# EAGLE board ADTWin-Octopus (EAGLE 6.6.0)
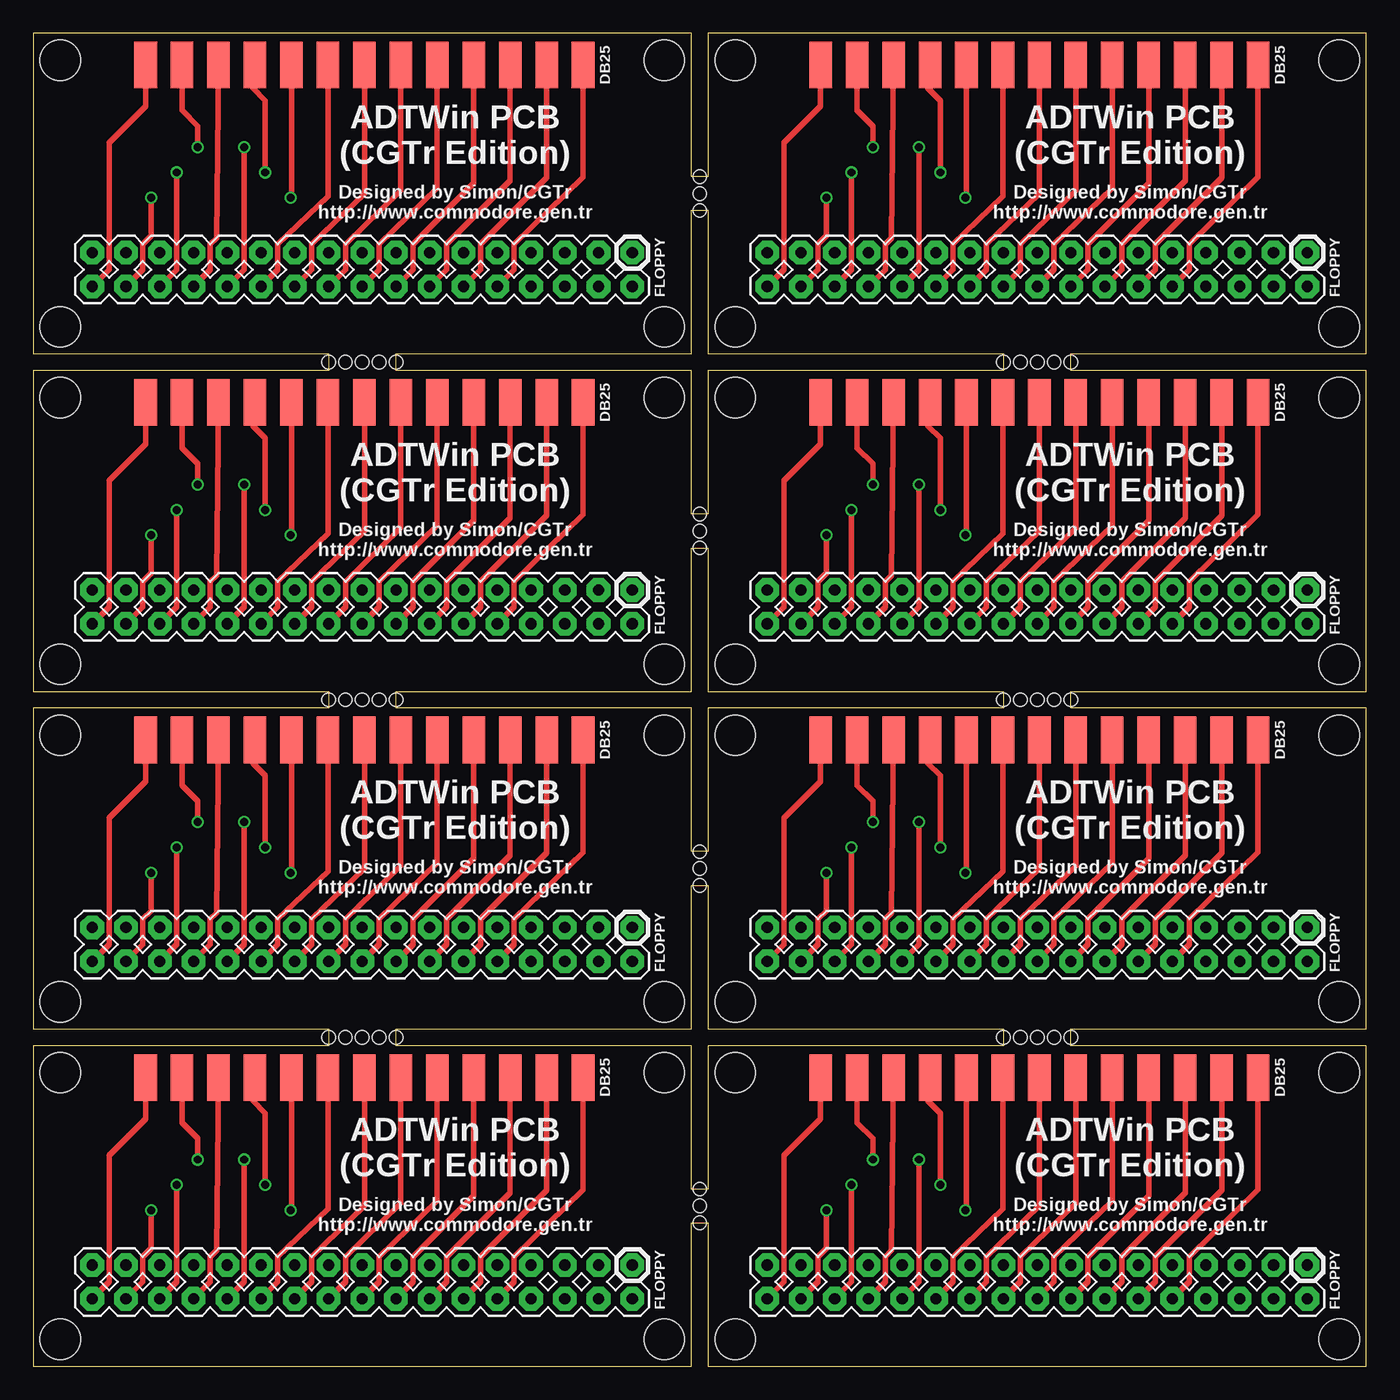
[diagram p0: board, top side]
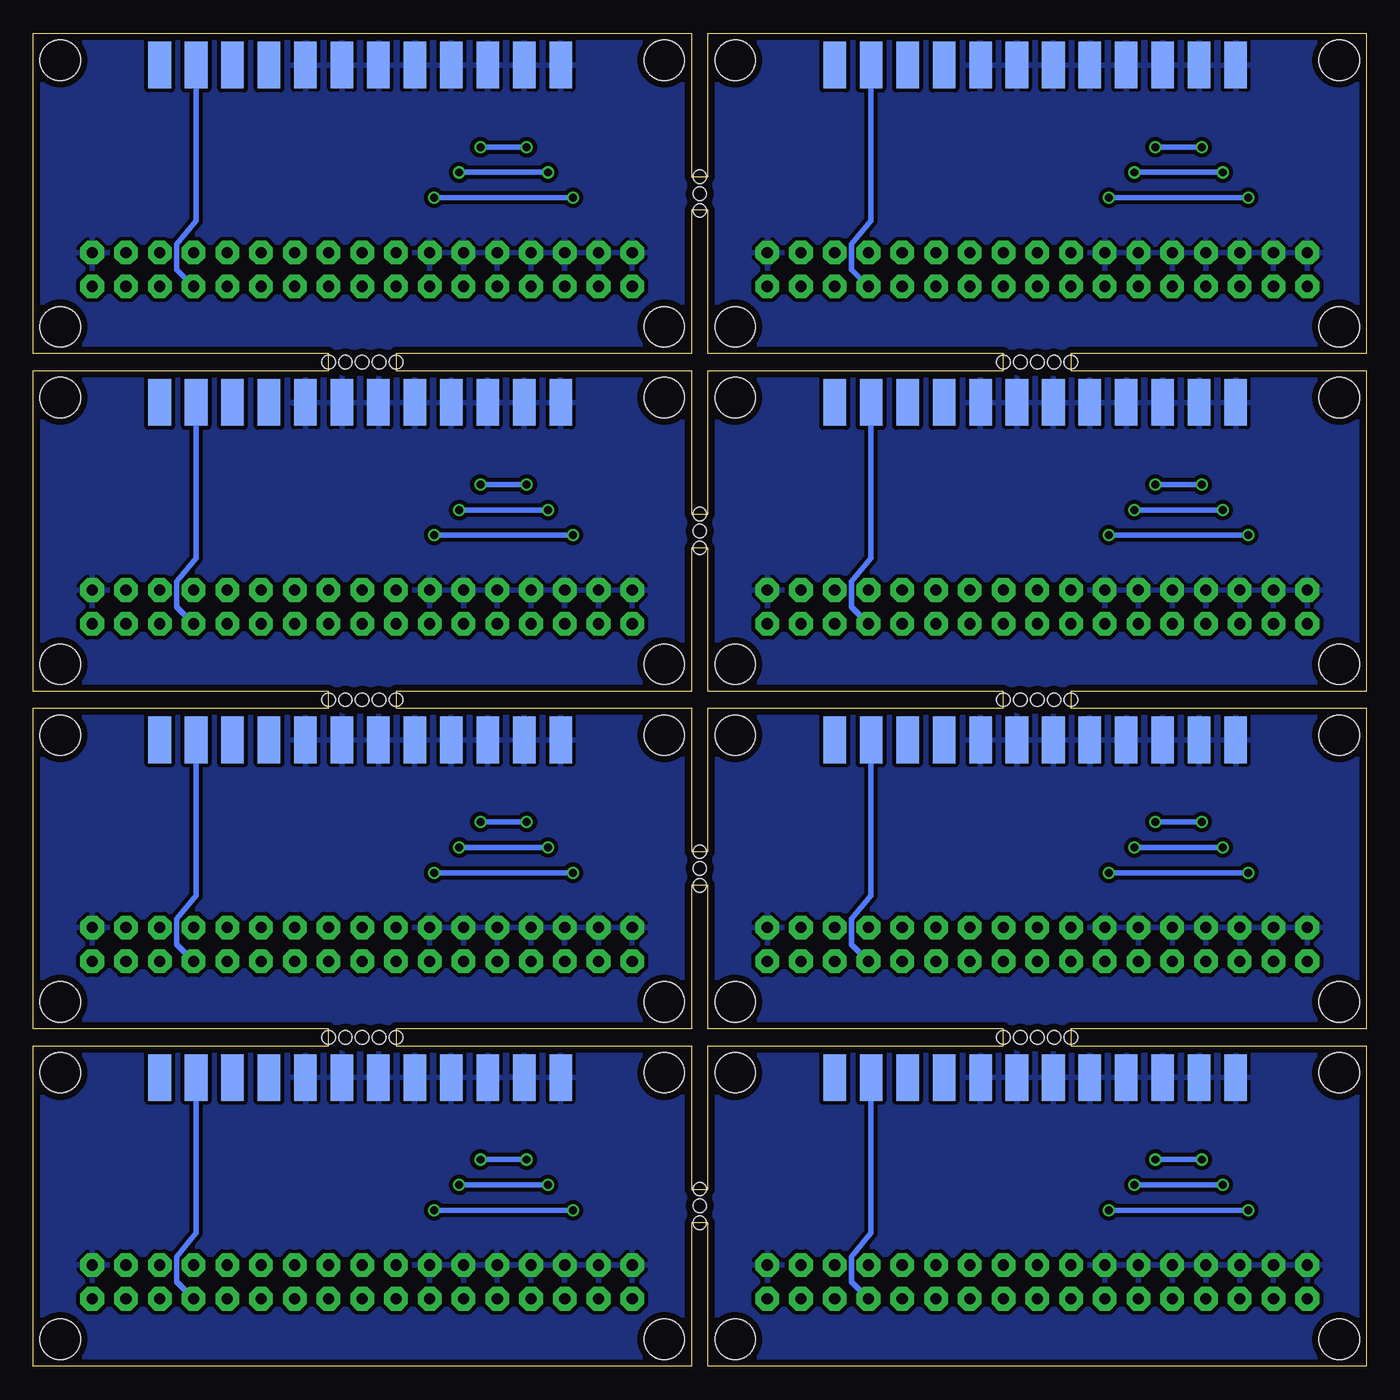
[diagram p1: board, bottom side, seen from below]

Size 100.33 x 100.33 mm. Coordinates in mm from the lower left corner, seen from the top.
Outline: 0,0 49.53,0 49.53,10.79 50.8,10.79 50.8,0 100.33,0 100.33,24.13 78.11,24.13 78.11,25.4 100.33,25.4 100.33,49.53 78.11,49.53 78.11,50.8 100.33,50.8 100.33,74.93 78.11,74.93 78.11,76.2 100.33,76.2 100.33,100.33 50.8,100.33 50.8,89.53 49.53,89.53 49.53,100.33 0,100.33 0,76.2 22.23,76.2 22.23,74.93 0,74.93 0,50.8 22.23,50.8 22.23,49.53 0,49.53 0,25.4 22.23,25.4 22.23,24.13 0,24.13 0,0
Outline: 50.8,13.34 49.53,13.34 49.53,24.13 27.3,24.13 27.3,25.4 49.53,25.4 49.53,36.2 50.8,36.2 50.8,25.4 73.03,25.4 73.03,24.13 50.8,24.13 50.8,13.34
Outline: 50.8,38.73 49.53,38.73 49.53,49.53 27.3,49.53 27.3,50.8 49.53,50.8 49.53,61.59 50.8,61.59 50.8,50.8 73.03,50.8 73.03,49.53 50.8,49.53 50.8,38.73
Outline: 50.8,64.14 49.53,64.14 49.53,74.93 27.3,74.93 27.3,76.2 49.53,76.2 49.53,87 50.8,87 50.8,76.2 73.03,76.2 73.03,74.93 50.8,74.93 50.8,64.14
Copper layers (1*16): Top 0.035mm / dielectric 1.6mm / Bottom 0.035mm
Design rules "Elecrow": minimum track width 6mil, minimum drill 12mil, track to track 6mil, track to pad 6mil, pad to pad 6mil, via to via 8mil, smd to smd 0mil, copper to edge 20mil, drill to drill 10mil, minimum pad ring 6mil, minimum via ring 6mil, stop-mask expansion 0mil, vias tented up to drill 100mil, thermal gap 10mil
Holes 3.05 mm at 2.03,22.1 2.03,2.03 47.5,2.03 47.5,22.1 2.03,47.5 2.03,27.43 47.5,27.43 47.5,47.5 52.83,22.1 52.83,2.03 98.3,2.03 98.3,22.1 52.83,47.5 52.83,27.43 98.3,27.43 98.3,47.5 2.03,72.9 2.03,52.83 47.5,52.83 47.5,72.9 2.03,98.3 2.03,78.23 47.5,78.23 47.5,98.3 52.83,72.9 52.83,52.83 98.3,52.83 98.3,72.9 52.83,98.3 52.83,78.23 98.3,78.23 98.3,98.3
Holes 1.02 mm at 22.23,24.77 23.5,24.77 24.77,24.77 26.04,24.77 27.3,24.77 73.03,24.77 74.3,24.77 75.56,24.77 76.83,24.77 78.11,24.77 22.23,75.56 23.5,75.56 24.77,75.56 26.04,75.56 27.3,75.56 73.03,75.56 74.3,75.56 75.56,75.56 76.83,75.56 78.11,75.56 50.16,10.79 50.16,12.06 50.16,13.34 50.16,36.2 50.16,37.47 50.16,38.73 50.16,61.59 50.16,62.87 50.16,64.14 50.16,87 50.16,88.27 50.16,89.53 22.23,50.16 23.5,50.16 24.77,50.16 26.04,50.16 27.3,50.16 73.03,50.16 74.3,50.16 75.56,50.16 76.83,50.16 78.11,50.16

## Footprints (pad centres in the part's own frame; a part is rotated, then mirrored left to right if it is on the bottom)
FLOPPY = drill 0.838 pad 1.778 octagon: 1 0,0; 2 0,2.54; 3 2.54,0; 4 2.54,2.54; 5 5.08,0; 6 5.08,2.54; 7 7.62,0; 8 7.62,2.54; 9 10.16,0; 10 10.16,2.54; 11 12.7,0; 12 12.7,2.54; 13 15.24,0; 14 15.24,2.54; 15 17.78,0; 16 17.78,2.54; 17 20.32,0; 18 20.32,2.54; 19 22.86,0; 20 22.86,2.54; 21 25.4,0; 22 25.4,2.54; 23 27.94,0; 24 27.94,2.54; 25 30.48,0; 26 30.48,2.54; 27 33.02,0; 28 33.02,2.54; 29 35.56,0; 30 35.56,2.54; 31 38.1,0; 32 38.1,2.54; 33 40.64,0; 34 40.64,2.54
DSUB25-SMD = smd 1.7 x 3.5: 1 16.459,-1.917; 2 13.716,-1.917; 3 10.973,-1.917; 4 8.23,-1.917; 5 5.486,-1.917; 6 2.743,-1.917; 7 0,-1.917; 8 -2.743,-1.917; 9 -5.486,-1.917; 10 -8.23,-1.917; 11 -10.973,-1.917; 12 -13.716,-1.917; 13 -16.459,-1.917 | smd 1.7 x 3.5 bottom: 14 15.088,-1.918; 15 12.344,-1.918; 16 9.601,-1.918; 17 6.858,-1.918; 18 4.115,-1.918; 19 1.372,-1.918; 20 -1.372,-1.918; 21 -4.115,-1.918; 22 -6.858,-1.918; 23 -9.601,-1.918; 24 -12.344,-1.918; 25 -15.088,-1.918

## Placement (x,y rotation side)
JP1  FLOPPY  [FLOPPY]  45.09,7.62 180 top
JP2  FLOPPY  [FLOPPY]  95.89,7.62 180 top
JP3  FLOPPY  [FLOPPY]  45.09,33.02 180 top
JP4  FLOPPY  [FLOPPY]  95.89,33.02 180 top
JP5  FLOPPY  [FLOPPY]  45.09,58.42 180 top
JP6  FLOPPY  [FLOPPY]  95.89,58.42 180 top
JP7  FLOPPY  [FLOPPY]  45.09,83.82 180 top
JP8  FLOPPY  [FLOPPY]  95.89,83.82 180 top
X1  DB25  [DSUB25-SMD]  24.92,23.65 0 top
X2  DB25  [DSUB25-SMD]  75.72,23.65 0 top
X3  DB25  [DSUB25-SMD]  24.92,49.05 0 top
X4  DB25  [DSUB25-SMD]  75.72,49.05 0 top
X5  DB25  [DSUB25-SMD]  24.92,74.45 0 top
X6  DB25  [DSUB25-SMD]  75.72,74.45 0 top
X7  DB25  [DSUB25-SMD]  24.92,99.85 0 top
X8  DB25  [DSUB25-SMD]  75.72,99.85 0 top

## Library data of the parts
JP1-JP8 X1-X8 = sj_connectors

## Nets
DIR: JP1.18 X1.5
DIR1: JP2.18 X2.5
DIR2: JP3.18 X3.5
DIR3: JP4.18 X4.5
DIR4: JP5.18 X5.5
DIR5: JP6.18 X6.5
DIR6: JP7.18 X7.5
DIR7: JP8.18 X8.5
DRVSA: JP1.14 X1.3
DRVSA1: JP2.14 X2.3
DRVSA2: JP3.14 X3.3
DRVSA3: JP4.14 X4.3
DRVSA4: JP5.14 X5.3
DRVSA5: JP6.14 X6.3
DRVSA6: JP7.14 X7.3
DRVSA7: JP8.14 X8.3
DRVSB: JP1.12 X1.2
DRVSB1: JP2.12 X2.2
DRVSB2: JP3.12 X3.2
DRVSB3: JP4.12 X4.2
DRVSB4: JP5.12 X5.2
DRVSB5: JP6.12 X6.2
DRVSB6: JP7.12 X7.2
DRVSB7: JP8.12 X8.2
DSKCHG: JP1.34 X1.13
DSKCHG1: JP2.34 X2.13
DSKCHG2: JP3.34 X3.13
DSKCHG3: JP4.34 X4.13
DSKCHG4: JP5.34 X5.13
DSKCHG5: JP6.34 X6.13
DSKCHG6: JP7.34 X7.13
DSKCHG7: JP8.34 X8.13
GND: JP1.1 JP1.21 JP1.23 JP1.25 JP1.27 JP1.29 JP1.31 JP1.33 X1.18 X1.19 X1.20 X1.21 X1.22 X1.23 X1.24 X1.25
GND1: JP2.1 JP2.21 JP2.23 JP2.25 JP2.27 JP2.29 JP2.31 JP2.33 X2.18 X2.19 X2.20 X2.21 X2.22 X2.23 X2.24 X2.25
GND2: JP3.1 JP3.21 JP3.23 JP3.25 JP3.27 JP3.29 JP3.31 JP3.33 X3.18 X3.19 X3.20 X3.21 X3.22 X3.23 X3.24 X3.25
GND3: JP4.1 JP4.21 JP4.23 JP4.25 JP4.27 JP4.29 JP4.31 JP4.33 X4.18 X4.19 X4.20 X4.21 X4.22 X4.23 X4.24 X4.25
GND4: JP5.1 JP5.21 JP5.23 JP5.25 JP5.27 JP5.29 JP5.31 JP5.33 X5.18 X5.19 X5.20 X5.21 X5.22 X5.23 X5.24 X5.25
GND5: JP6.1 JP6.21 JP6.23 JP6.25 JP6.27 JP6.29 JP6.31 JP6.33 X6.18 X6.19 X6.20 X6.21 X6.22 X6.23 X6.24 X6.25
GND6: JP7.1 JP7.21 JP7.23 JP7.25 JP7.27 JP7.29 JP7.31 JP7.33 X7.18 X7.19 X7.20 X7.21 X7.22 X7.23 X7.24 X7.25
GND7: JP8.1 JP8.21 JP8.23 JP8.25 JP8.27 JP8.29 JP8.31 JP8.33 X8.18 X8.19 X8.20 X8.21 X8.22 X8.23 X8.24 X8.25
INDEX: JP1.8 X1.15
INDEX1: JP2.8 X2.15
INDEX2: JP3.8 X3.15
INDEX3: JP4.8 X4.15
INDEX4: JP5.8 X5.15
INDEX5: JP6.8 X6.15
INDEX6: JP7.8 X7.15
INDEX7: JP8.8 X8.15
MOTEA: JP1.10 X1.1
MOTEA1: JP2.10 X2.1
MOTEA2: JP3.10 X3.1
MOTEA3: JP4.10 X4.1
MOTEA4: JP5.10 X5.1
MOTEA5: JP6.10 X6.1
MOTEA6: JP7.10 X7.1
MOTEA7: JP8.10 X8.1
MOTEB: JP1.16 X1.4
MOTEB1: JP2.16 X2.4
MOTEB2: JP3.16 X3.4
MOTEB3: JP4.16 X4.4
MOTEB4: JP5.16 X5.4
MOTEB5: JP6.16 X6.4
MOTEB6: JP7.16 X7.4
MOTEB7: JP8.16 X8.4
RDATA: JP1.30 X1.10
RDATA1: JP2.30 X2.10
RDATA2: JP3.30 X3.10
RDATA3: JP4.30 X4.10
RDATA4: JP5.30 X5.10
RDATA5: JP6.30 X6.10
RDATA6: JP7.30 X7.10
RDATA7: JP8.30 X8.10
SIDE1: JP1.32 X1.9
SIDE2: JP2.32 X2.9
SIDE3: JP3.32 X3.9
SIDE4: JP4.32 X4.9
SIDE5: JP5.32 X5.9
SIDE6: JP6.32 X6.9
SIDE7: JP7.32 X7.9
SIDE8: JP8.32 X8.9
STEP: JP1.20 X1.6
STEP1: JP2.20 X2.6
STEP2: JP3.20 X3.6
STEP3: JP4.20 X4.6
STEP4: JP5.20 X5.6
STEP5: JP6.20 X6.6
STEP6: JP7.20 X7.6
STEP7: JP8.20 X8.6
TRK00: JP1.26 X1.12
TRK01: JP2.26 X2.12
TRK02: JP3.26 X3.12
TRK03: JP4.26 X4.12
TRK04: JP5.26 X5.12
TRK05: JP6.26 X6.12
TRK06: JP7.26 X7.12
TRK07: JP8.26 X8.12
WDATA: JP1.22 X1.7
WDATA1: JP2.22 X2.7
WDATA2: JP3.22 X3.7
WDATA3: JP4.22 X4.7
WDATA4: JP5.22 X5.7
WDATA5: JP6.22 X6.7
WDATA6: JP7.22 X7.7
WDATA7: JP8.22 X8.7
WGATE: JP1.24 X1.8
WGATE1: JP2.24 X2.8
WGATE2: JP3.24 X3.8
WGATE3: JP4.24 X4.8
WGATE4: JP5.24 X5.8
WGATE5: JP6.24 X6.8
WGATE6: JP7.24 X7.8
WGATE7: JP8.24 X8.8
WPROT: JP1.28 X1.11
WPROT1: JP2.28 X2.11
WPROT2: JP3.28 X3.11
WPROT3: JP4.28 X4.11
WPROT4: JP5.28 X5.11
WPROT5: JP6.28 X6.11
WPROT6: JP7.28 X7.11
WPROT7: JP8.28 X8.11

## Tracks (layer width: path | path; a pad name or v marks a point on that pad's centre or on a via)
DIR
  Top 0.406: X1.5 30.41,12.47 26.04,8.26 26.04,6.35 JP1.18
DIR1
  Top 0.406: X2.5 81.21,12.47 76.83,8.26 76.83,6.35 JP2.18
DIR2
  Top 0.406: X3.5 30.41,37.87 26.04,33.66 26.04,31.75 JP3.18
DIR3
  Top 0.406: X4.5 81.21,37.87 76.83,33.66 76.83,31.75 JP4.18
DIR4
  Top 0.406: X5.5 30.41,63.27 26.04,59.05 26.04,57.15 JP5.18
DIR5
  Top 0.406: X6.5 81.21,63.27 76.83,59.05 76.83,57.15 JP6.18
DIR6
  Top 0.406: X7.5 30.41,88.67 26.04,84.45 26.04,82.55 JP7.18
DIR7
  Top 0.406: X8.5 81.21,88.67 76.83,84.45 76.83,82.55 JP8.18
DRVSA
  Top 0.406: X1.3 35.9,13.04 31.11,8.26 31.11,6.35 JP1.14
DRVSA1
  Top 0.406: X2.3 86.7,13.04 81.92,8.26 81.92,6.35 JP2.14
DRVSA2
  Top 0.406: X3.3 35.9,38.44 31.11,33.66 31.11,31.75 JP3.14
DRVSA3
  Top 0.406: X4.3 86.7,38.44 81.92,33.66 81.92,31.75 JP4.14
DRVSA4
  Top 0.406: X5.3 35.9,63.84 31.11,59.05 31.11,57.15 JP5.14
DRVSA5
  Top 0.406: X6.3 86.7,63.84 81.92,59.05 81.92,57.15 JP6.14
DRVSA6
  Top 0.406: X7.3 35.9,89.24 31.11,84.45 31.11,82.55 JP7.14
DRVSA7
  Top 0.406: X8.3 86.7,89.24 81.92,84.45 81.92,82.55 JP8.14
DRVSB
  Top 0.406: X1.2 38.64,13.24 33.66,8.26 33.66,6.35 JP1.12
DRVSB1
  Top 0.406: X2.2 89.44,13.24 84.45,8.26 84.45,6.35 JP2.12
DRVSB2
  Top 0.406: X3.2 38.64,38.64 33.66,33.66 33.66,31.75 JP3.12
DRVSB3
  Top 0.406: X4.2 89.44,38.64 84.45,33.66 84.45,31.75 JP4.12
DRVSB4
  Top 0.406: X5.2 38.64,64.04 33.66,59.05 33.66,57.15 JP5.12
DRVSB5
  Top 0.406: X6.2 89.44,64.04 84.45,59.05 84.45,57.15 JP6.12
DRVSB6
  Top 0.406: X7.2 38.64,89.44 33.66,84.45 33.66,82.55 JP7.12
DRVSB7
  Top 0.406: X8.2 89.44,89.44 84.45,84.45 84.45,82.55 JP8.12
DSKCHG
  Top 0.406: JP1.34 5.71,6.35 5.71,15.88 8.46,18.62 X1.13
DSKCHG1
  Top 0.406: JP2.34 56.52,6.35 56.52,15.88 59.26,18.62 X2.13
DSKCHG2
  Top 0.406: JP3.34 5.71,31.75 5.71,41.27 8.46,44.02 X3.13
DSKCHG3
  Top 0.406: JP4.34 56.52,31.75 56.52,41.27 59.26,44.02 X4.13
DSKCHG4
  Top 0.406: JP5.34 5.71,57.15 5.71,66.67 8.46,69.42 X5.13
DSKCHG5
  Top 0.406: JP6.34 56.52,57.15 56.52,66.67 59.26,69.42 X6.13
DSKCHG6
  Top 0.406: JP7.34 5.71,82.55 5.71,92.08 8.46,94.82 X7.13
DSKCHG7
  Top 0.406: JP8.34 56.52,82.55 56.52,92.08 59.26,94.82 X8.13
GND
  pour Bottom (isolate 0.305): 0,24.13 49.53,24.13 49.53,0 0,0
GND1
  pour Bottom (isolate 0.305): 50.8,24.13 100.33,24.13 100.33,0 50.8,0
GND2
  pour Bottom (isolate 0.305): 0,49.53 49.53,49.53 49.53,25.4 0,25.4
GND3
  pour Bottom (isolate 0.305): 50.8,49.53 100.33,49.53 100.33,25.4 50.8,25.4
GND4
  pour Bottom (isolate 0.305): 0,74.93 49.53,74.93 49.53,50.8 0,50.8
GND5
  pour Bottom (isolate 0.305): 50.8,74.93 100.33,74.93 100.33,50.8 50.8,50.8
GND6
  pour Bottom (isolate 0.305): 0,100.33 49.53,100.33 49.53,76.2 0,76.2
GND7
  pour Bottom (isolate 0.305): 50.8,100.33 100.33,100.33 100.33,76.2 50.8,76.2
INDEX
  Bottom 0.406: X1.15 37.27,10.04 38.73,8.26 38.73,6.35 JP1.8
INDEX1
  Bottom 0.406: X2.15 88.07,10.04 89.53,8.26 89.53,6.35 JP2.8
INDEX2
  Bottom 0.406: X3.15 37.27,35.44 38.73,33.66 38.73,31.75 JP3.8
INDEX3
  Bottom 0.406: X4.15 88.07,35.44 89.53,33.66 89.53,31.75 JP4.8
INDEX4
  Bottom 0.406: X5.15 37.27,60.84 38.73,59.05 38.73,57.15 JP5.8
INDEX5
  Bottom 0.406: X6.15 88.07,60.84 89.53,59.05 89.53,57.15 JP6.8
INDEX6
  Bottom 0.406: X7.15 37.27,86.24 38.73,84.45 38.73,82.55 JP7.8
INDEX7
  Bottom 0.406: X8.15 88.07,86.24 89.53,84.45 89.53,82.55 JP8.8
MOTEA
  Top 0.406: X1.1 41.38,13.28 36.2,8.26 36.2,6.35 JP1.10
MOTEA1
  Top 0.406: X2.1 92.18,13.28 87,8.26 87,6.35 JP2.10
MOTEA2
  Top 0.406: X3.1 41.38,38.68 36.2,33.66 36.2,31.75 JP3.10
MOTEA3
  Top 0.406: X4.1 92.18,38.68 87,33.66 87,31.75 JP4.10
MOTEA4
  Top 0.406: X5.1 41.38,64.08 36.2,59.05 36.2,57.15 JP5.10
MOTEA5
  Top 0.406: X6.1 92.18,64.08 87,59.05 87,57.15 JP6.10
MOTEA6
  Top 0.406: X7.1 41.38,89.48 36.2,84.45 36.2,82.55 JP7.10
MOTEA7
  Top 0.406: X8.1 92.18,89.48 87,84.45 87,82.55 JP8.10
MOTEB
  Top 0.406: X1.4 33.15,12.83 28.57,8.26 28.57,6.35 JP1.16
MOTEB1
  Top 0.406: X2.4 83.95,12.83 79.38,8.26 79.38,6.35 JP2.16
MOTEB2
  Top 0.406: X3.4 33.15,38.23 28.57,33.66 28.57,31.75 JP3.16
MOTEB3
  Top 0.406: X4.4 83.95,38.23 79.38,33.66 79.38,31.75 JP4.16
MOTEB4
  Top 0.406: X5.4 33.15,63.63 28.57,59.05 28.57,57.15 JP5.16
MOTEB5
  Top 0.406: X6.4 83.95,63.63 79.38,59.05 79.38,57.15 JP6.16
MOTEB6
  Top 0.406: X7.4 33.15,89.03 28.57,84.45 28.57,82.55 JP7.16
MOTEB7
  Top 0.406: X8.4 83.95,89.03 79.38,84.45 79.38,82.55 JP8.16
RDATA  (via drill 0.6)
  Top 0.406: v10.79,13.65 10.79,6.35 JP1.30 | X1.10 16.54,19.98 17.46,19.05 v17.46,13.65
  Bottom 0.406: v10.79,13.65 v17.46,13.65
RDATA1  (via drill 0.6)
  Top 0.406: v61.59,13.65 61.59,6.35 JP2.30 | X2.10 67.33,19.98 68.26,19.05 v68.26,13.65
  Bottom 0.406: v61.59,13.65 v68.26,13.65
RDATA2  (via drill 0.6)
  Top 0.406: v10.79,39.05 10.79,31.75 JP3.30 | X3.10 16.54,45.38 17.46,44.45 v17.46,39.05
  Bottom 0.406: v10.79,39.05 v17.46,39.05
RDATA3  (via drill 0.6)
  Top 0.406: v61.59,39.05 61.59,31.75 JP4.30 | X4.10 67.33,45.38 68.26,44.45 v68.26,39.05
  Bottom 0.406: v61.59,39.05 v68.26,39.05
RDATA4  (via drill 0.6)
  Top 0.406: v10.79,64.45 10.79,57.15 JP5.30 | X5.10 16.54,70.78 17.46,69.85 v17.46,64.45
  Bottom 0.406: v10.79,64.45 v17.46,64.45
RDATA5  (via drill 0.6)
  Top 0.406: v61.59,64.45 61.59,57.15 JP6.30 | X6.10 67.33,70.78 68.26,69.85 v68.26,64.45
  Bottom 0.406: v61.59,64.45 v68.26,64.45
RDATA6  (via drill 0.6)
  Top 0.406: v10.79,89.85 10.79,82.55 JP7.30 | X7.10 16.54,96.18 17.46,95.25 v17.46,89.85
  Bottom 0.406: v10.79,89.85 v17.46,89.85
RDATA7  (via drill 0.6)
  Top 0.406: v61.59,89.85 61.59,82.55 JP8.30 | X8.10 67.33,96.18 68.26,95.25 v68.26,89.85
  Bottom 0.406: v61.59,89.85 v68.26,89.85
SIDE1  (via drill 0.6)
  Top 0.406: JP1.32 8.26,6.35 8.26,8.26 8.89,8.89 v8.89,11.75 | X1.9 19.44,11.84 v19.37,11.75
  Bottom 0.406: v8.89,11.75 v19.37,11.75
SIDE2  (via drill 0.6)
  Top 0.406: JP2.32 59.05,6.35 59.05,8.26 59.69,8.89 v59.69,11.75 | X2.9 70.24,11.84 v70.17,11.75
  Bottom 0.406: v59.69,11.75 v70.17,11.75
SIDE3  (via drill 0.6)
  Top 0.406: JP3.32 8.26,31.75 8.26,33.66 8.89,34.29 v8.89,37.15 | X3.9 19.44,37.24 v19.37,37.15
  Bottom 0.406: v8.89,37.15 v19.37,37.15
SIDE4  (via drill 0.6)
  Top 0.406: JP4.32 59.05,31.75 59.05,33.66 59.69,34.29 v59.69,37.15 | X4.9 70.24,37.24 v70.17,37.15
  Bottom 0.406: v59.69,37.15 v70.17,37.15
SIDE5  (via drill 0.6)
  Top 0.406: JP5.32 8.26,57.15 8.26,59.05 8.89,59.69 v8.89,62.55 | X5.9 19.44,62.64 v19.37,62.55
  Bottom 0.406: v8.89,62.55 v19.37,62.55
SIDE6  (via drill 0.6)
  Top 0.406: JP6.32 59.05,57.15 59.05,59.05 59.69,59.69 v59.69,62.55 | X6.9 70.24,62.64 v70.17,62.55
  Bottom 0.406: v59.69,62.55 v70.17,62.55
SIDE7  (via drill 0.6)
  Top 0.406: JP7.32 8.26,82.55 8.26,84.45 8.89,85.09 v8.89,87.95 | X7.9 19.44,88.04 v19.37,87.95
  Bottom 0.406: v8.89,87.95 v19.37,87.95
SIDE8  (via drill 0.6)
  Top 0.406: JP8.32 59.05,82.55 59.05,84.45 59.69,85.09 v59.69,87.95 | X8.9 70.24,88.04 v70.17,87.95
  Bottom 0.406: v59.69,87.95 v70.17,87.95
STEP
  Top 0.406: X1.6 27.67,12.27 23.5,8.26 23.5,6.35 JP1.20
STEP1
  Top 0.406: X2.6 78.47,12.27 74.3,8.26 74.3,6.35 JP2.20
STEP2
  Top 0.406: X3.6 27.67,37.67 23.5,33.66 23.5,31.75 JP3.20
STEP3
  Top 0.406: X4.6 78.47,37.67 74.3,33.66 74.3,31.75 JP4.20
STEP4
  Top 0.406: X5.6 27.67,63.07 23.5,59.05 23.5,57.15 JP5.20
STEP5
  Top 0.406: X6.6 78.47,63.07 74.3,59.05 74.3,57.15 JP6.20
STEP6
  Top 0.406: X7.6 27.67,88.47 23.5,84.45 23.5,82.55 JP7.20
STEP7
  Top 0.406: X8.6 78.47,88.47 74.3,84.45 74.3,82.55 JP8.20
TRK00  (via drill 0.6)
  Top 0.406: v15.88,15.56 15.88,6.35 JP1.26 | X1.12 11.21,18.32 12.38,17.14 v12.38,15.56
  Bottom 0.406: v15.88,15.56 v12.38,15.56
TRK01  (via drill 0.6)
  Top 0.406: v66.67,15.56 66.67,6.35 JP2.26 | X2.12 62.01,18.32 63.18,17.14 v63.18,15.56
  Bottom 0.406: v66.67,15.56 v63.18,15.56
TRK02  (via drill 0.6)
  Top 0.406: v15.88,40.96 15.88,31.75 JP3.26 | X3.12 11.21,43.72 12.38,42.55 v12.38,40.96
  Bottom 0.406: v15.88,40.96 v12.38,40.96
TRK03  (via drill 0.6)
  Top 0.406: v66.67,40.96 66.67,31.75 JP4.26 | X4.12 62.01,43.72 63.18,42.55 v63.18,40.96
  Bottom 0.406: v66.67,40.96 v63.18,40.96
TRK04  (via drill 0.6)
  Top 0.406: v15.88,66.36 15.88,57.15 JP5.26 | X5.12 11.21,69.12 12.38,67.94 v12.38,66.36
  Bottom 0.406: v15.88,66.36 v12.38,66.36
TRK05  (via drill 0.6)
  Top 0.406: v66.67,66.36 66.67,57.15 JP6.26 | X6.12 62.01,69.12 63.18,67.94 v63.18,66.36
  Bottom 0.406: v66.67,66.36 v63.18,66.36
TRK06  (via drill 0.6)
  Top 0.406: v15.88,91.76 15.88,82.55 JP7.26 | X7.12 11.21,94.52 12.38,93.34 v12.38,91.76
  Bottom 0.406: v15.88,91.76 v12.38,91.76
TRK07  (via drill 0.6)
  Top 0.406: v66.67,91.76 66.67,82.55 JP8.26 | X8.12 62.01,94.52 63.18,93.34 v63.18,91.76
  Bottom 0.406: v66.67,91.76 v63.18,91.76
WDATA
  Top 0.406: X1.7 24.92,12.06 20.95,8.26 20.95,6.35 JP1.22
WDATA1
  Top 0.406: X2.7 75.72,12.06 71.75,8.26 71.75,6.35 JP2.22
WDATA2
  Top 0.406: X3.7 24.92,37.47 20.95,33.66 20.95,31.75 JP3.22
WDATA3
  Top 0.406: X4.7 75.72,37.47 71.75,33.66 71.75,31.75 JP4.22
WDATA4
  Top 0.406: X5.7 24.92,62.87 20.95,59.05 20.95,57.15 JP5.22
WDATA5
  Top 0.406: X6.7 75.72,62.87 71.75,59.05 71.75,57.15 JP6.22
WDATA6
  Top 0.406: X7.7 24.92,88.27 20.95,84.45 20.95,82.55 JP7.22
WDATA7
  Top 0.406: X8.7 75.72,88.27 71.75,84.45 71.75,82.55 JP8.22
WGATE
  Top 0.406: X1.8 22.18,11.86 18.41,8.26 18.41,6.35 JP1.24
WGATE1
  Top 0.406: X2.8 72.98,11.86 69.22,8.26 69.22,6.35 JP2.24
WGATE2
  Top 0.406: X3.8 22.18,37.26 18.41,33.66 18.41,31.75 JP3.24
WGATE3
  Top 0.406: X4.8 72.98,37.26 69.22,33.66 69.22,31.75 JP4.24
WGATE4
  Top 0.406: X5.8 22.18,62.66 18.41,59.05 18.41,57.15 JP5.24
WGATE5
  Top 0.406: X6.8 72.98,62.66 69.22,59.05 69.22,57.15 JP6.24
WGATE6
  Top 0.406: X7.8 22.18,88.06 18.41,84.45 18.41,82.55 JP7.24
WGATE7
  Top 0.406: X8.8 72.98,88.06 69.22,84.45 69.22,82.55 JP8.24
WPROT
  Top 0.406: JP1.28 13.34,6.35 13.34,8.26 13.79,8.71 X1.11
WPROT1
  Top 0.406: JP2.28 64.14,6.35 64.14,8.26 64.59,8.71 X2.11
WPROT2
  Top 0.406: JP3.28 13.34,31.75 13.34,33.66 13.79,34.11 X3.11
WPROT3
  Top 0.406: JP4.28 64.14,31.75 64.14,33.66 64.59,34.11 X4.11
WPROT4
  Top 0.406: JP5.28 13.34,57.15 13.34,59.05 13.79,59.51 X5.11
WPROT5
  Top 0.406: JP6.28 64.14,57.15 64.14,59.05 64.59,59.51 X6.11
WPROT6
  Top 0.406: JP7.28 13.34,82.55 13.34,84.45 13.79,84.91 X7.11
WPROT7
  Top 0.406: JP8.28 64.14,82.55 64.14,84.45 64.59,84.91 X8.11

## Text on the board
tNames: ADTWin PCB / (CGTr Edition) | ADTWin PCB / (CGTr Edition) | Designed by Simon/CGTr / http://www.commodore.gen.tr | Designed by Simon/CGTr / http://www.commodore.gen.tr | ADTWin PCB / (CGTr Edition) | ADTWin PCB / (CGTr Edition) | Designed by Simon/CGTr / http://www.commodore.gen.tr | Designed by Simon/CGTr / http://www.commodore.gen.tr | ADTWin PCB / (CGTr Edition) | ADTWin PCB / (CGTr Edition) | Designed by Simon/CGTr / http://www.commodore.gen.tr | Designed by Simon/CGTr / http://www.commodore.gen.tr | ADTWin PCB / (CGTr Edition) | ADTWin PCB / (CGTr Edition) | Designed by Simon/CGTr / http://www.commodore.gen.tr | Designed by Simon/CGTr / http://www.commodore.gen.tr